# Altium PCB PCB1.PcbDoc (part 2 of 2)
Units mil, origin at the board's own origin, x right, y up, seen from the top; angles counter-clockwise.
Board outline 2180.03 x 4000.03 mil, 4 copper layers (Top Layer, GROUND, PWR, Bottom Layer), stack 23.756 mil thick; 106 components, 124 nets, 404 pads, 178 vias.
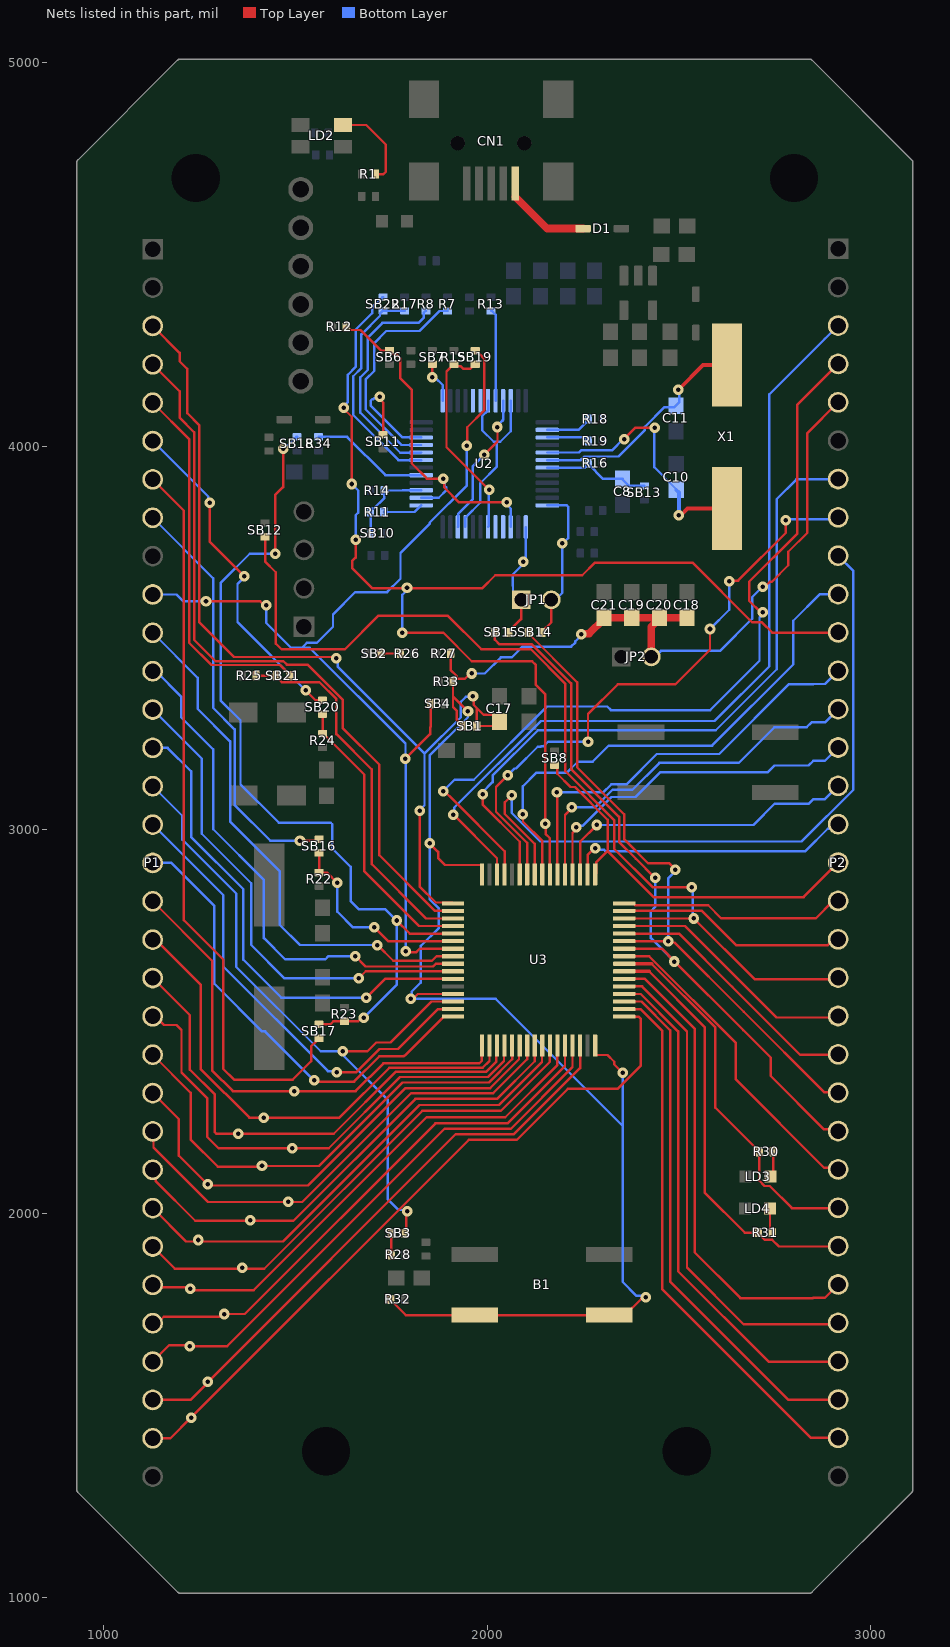
[diagram p4: the nets of this part, all layers, seen from the top]

## Via types
v1: diameter 27.56, hole 11.81, Top Layer to Bottom Layer, 166 vias
v2: diameter 11, hole 10, Top Layer to Bottom Layer, tented top, 4 vias
v3: diameter 27.56, hole 11.81, PWR to Bottom Layer, 4 vias
v4: diameter 27.56, hole 11.81, GROUND to Bottom Layer, 4 vias

## Nets (pads, with @x,y where several pads share a name; then routed paths per layer and width w, separated by ;. In a path a pad name is that pad's centre, name@x,y a point inside that pad or via, vN(x,y) a via of type N, cw(c..) or ccw(c..) an arc to the next point about the centre after c; other vN are vias at no path point) (continued)
NetLD2_4: LD2.4 R1.1 | length 232.7
  Top Layer w6.3: LD2.4@1624,4838 1684.61,4838 1735.49,4787.12 1735.49,4715.86 1729.63,4710 R1.1@1709,4710
NetLD3_1: 
NetLD4_1: LD3.1 LD4.1 R30.2 R31.2 | length 132.9
  Top Layer w6.3: LD4.1@2737.48,2013 2737.48,1957.6 2742.91,1952.17 R31.2@2742.91,1950 ; LD3.1@2739,2096 2745.43,2102.43 R30.2@2745.43,2161
NetR13_2: R13.2 U2.44 | length 240.3
  Bottom Layer w6.3: R13.2@2010,4353.17 2012.17,4353.17 2022,4343.34 U2.44@2022,4119.13
NetR18_2: R18.2 U2.2 | length 119.9
  Bottom Layer w6.3: U2.2@2157.04,4043.15 2238.4,4043.15 2264.09,4068.83 R18.2@2264.09,4071
NetR19_2: R19.2 U2.3 | length 112.1
  Bottom Layer w6.3: U2.3@2157.04,4023.46 2256.7,4023.46 2264,4016.17 R19.2@2264,4014
NetR22_1: R22.1 SB16.1 U3.6 | length 518
  Top Layer w6.3: SB16.1@1562,2940.17 R22.1@1562,2888.91 1582.09,2888.91 v1(1609,2862) ; v1(1706,2746) 1741.79,2710.21 U3.6@1910.77,2710.21
  Bottom Layer w6.3: v1(1609,2862) 1609,2787 1650,2746 v1(1706,2746)
NetR23_2: R23.2 SB17.2 SB18.2 U3.5 | length 2267.7
  Top Layer w6.3: v1(1447,3720) 1447,3873 1468,3894 v1(1468,3994) ; SB17.2@1562,2493 1590.91,2493 1599.09,2501.17 R23.2@1628,2501.17 1663.42,2501.17 1672.25,2510 v1(1678,2510) ; v1(1764,2764) 1798.1,2729.9 U3.5@1910.77,2729.9
  Bottom Layer w6.3: v1(1447,3720) 1381,3720 1305,3644 1305,3338 1357,3286 1357,3119 1457,3019 1592.31,3019 1596,3015.31 1596,2952 1644,2904 1644,2815 1666,2793 1735,2793 v1(1764,2764) 1764,2596 v1(1678,2510) ; v1@1469.76,3992.24 1502.31,4024.8 SB18.2@1504.48,4024.8
NetR24_2: R24.2 SB20.2 U3.4 | length 746.2
  Top Layer w6.3: SB20.2@1571,3302 R24.2@1571,3250.83 1573.17,3250.83 1680,3143.99 1680,2892 1822.42,2749.58 U3.4@1910.77,2749.58
NetR25_2: R25.2 SB21.2 U3.3 | length 974.3
  Top Layer w6.3: R25.2@1397.83,3402 SB21.2@1450,3402 1450,3399.83 1464.65,3385.18 1562.82,3385.18 1607,3341 1607,3249.83 1699,3157.83 1699,2911 1840.73,2769.27 U3.3@1910.77,2769.27
NetR26_1: R26.1 SB2.1 | length 51.2
  Top Layer w6.3: SB2.1@1722.91,3460 R26.1@1774.09,3460
NetR28_1: R28.1 SB3.2 | length 56
  Top Layer w6.3: R28.1@1750.09,1892 SB3.2@1750.09,1948
NetR34_1: R34.1 U2.29 | length 308.7
  Bottom Layer w6.3: R34.1@1560.48,4024.8 1634.86,4024.8 1734.62,3925.04 U2.29@1827.91,3925.04
NRST: P1.10 SB4.1 SB19.2 U3.7 | length 2733.2
  Top Layer w6.3: v1(1267,3596) 1408.25,3596 1418.25,3586 v1(1424,3586) ; v1(1787,3186) 1851.09,3250.09 1851.09,3267.17 1853.09,3269.17 SB4.1@1853.09,3329 ; v1(1788,2684) 1791,2681 1814.75,2681 1824.28,2690.53 U3.7@1910.77,2690.53 ; v1(1947,4002) 1948,4003 1948,4050 1992,4094 1992,4229.08 1971.17,4249.91 SB19.2@1969,4249.91
  Bottom Layer w6.3: P1.10@1128,3614 1190.04,3614 1208.04,3596 v1(1267,3596) ; v1(1424,3586) 1424,3540 1489,3475 1517,3475 ; v1(1788,2684) 1788,3175 1788,3185 v1(1787,3186) 1787,3225 1537,3475 1517,3475 ; v1(1947,4002) 1947,3898 1850,3801 1850,3798 1774,3722 1774,3655 1739,3620 1656,3620 1598.12,3562.12 1598.12,3529.93 1556.35,3488.16 1530.16,3488.16 1517,3475
OSC_IN: C10.2 U2.5 X1.2 | length 693.2
  Top Layer w6.3: v1(2357,4019) 2386.97,4048.97 2435.03,4048.97 v1@2436,4048
  Top Layer w10: v1(2500,3820) 2504.72,3820 2522.71,3837.99 X1.2@2625,3837.99
  Bottom Layer w6.3: U2.5@2157.04,3984.09 2239.53,3984.09 2245.1,3989.67 2325.67,3989.67 2355,4019 v1(2357,4019) ; v1@2436,4048 2436,3945.5 2493,3888.5 C10.2@2493,3886.54
  Bottom Layer w10: C10.2@2493,3886.54 2500,3879.54 v1(2500,3820)
  other v1: 2437.49,4048.97
OSC_OUT: C11.2 U2.6 X1.1 | length 588.4
  Top Layer w10: v1(2498.55,4147.65) 2562.91,4212.01 X1.1@2625,4212.01
  Bottom Layer w6.3: U2.6@2157.04,3964.41 2243.68,3964.41 2253.09,3973.81 2342.07,3973.81 2411.29,4043.03 2411.29,4051.27 2462.48,4102.46 2488,4102.46 C11.2@2492,4106.46 2500.38,4114.84 v1@2500.38,4139.62
PA0: P1.15 SB3.1 U3.14 | length 1830.2
  Top Layer w6.3: v1(1623,2423) 1688,2423 1711,2446 1748,2446 1854.73,2552.73 U3.14@1910.77,2552.73 ; SB3.1@1785.91,1948 1788.96,1951.04 1788.96,2002.96 v1(1792,2006)
  Bottom Layer w6.3: P1.15@1128,3114 1205,3037 1205,2975 1346,2834 1346,2643 1566,2423 v1(1623,2423) 1627.07,2418.93 1627.07,2409.96 1741.03,2296 1741.03,2036.97 1768.77,2009.23 1788.77,2009.23 v1(1792,2006)
PA1: P1.16 U3.15 | length 1227.7
  Top Layer w6.3: v1(1608,2368) 1658.32,2368 1719.32,2429 1768,2429 1872.05,2533.05 U3.15@1910.77,2533.05
  Bottom Layer w6.3: P1.16@1128,3014 1312,2830 1312,2644 1584.77,2371.23 1604.77,2371.23 v1(1608,2368)
PA2: P1.17 U3.16 | length 1207.9
  Top Layer w6.3: v1(1549,2347) 1552,2344 1653,2344 1719,2410 1782,2410 1784,2412 1785.98,2412 1887.35,2513.36 U3.16@1910.77,2513.36
  Bottom Layer w6.3: P1.17@1128,2914 1177,2914 1289,2802 1289,2599 1412.97,2475.03 1420.97,2475.03 v1(1549,2347)
PA3: P1.18 U3.17 | length 1303.2
  Top Layer w6.3: P1.18@1128,2814 1283,2659 1283,2373 1337,2319 v1(1497,2319) 1657,2319 1729.4,2391.4 1979.42,2391.4 1986.36,2398.34 U3.17@1986.36,2437.77
PA4: P1.21 U3.20 | length 1317.1
  Top Layer w6.3: P1.21@1128,2514 1134.7,2514 1157.1,2491.6 1189.71,2491.6 1203,2478.31 1203,2368 1269.79,2301.21 1269.79,2200.21 1300,2170 v1(1492,2170) 1587,2170 1773,2356 2002,2356 2043.89,2397.89 2043.89,2436.25 U3.20@2045.42,2437.77
PA5: P1.22 U3.21 | length 1281.2
  Top Layer w6.3: P1.22@1128,2414 1227,2315 1227,2193 1298,2122 1411,2122 v1(1413,2124) 1562,2124 1779.7,2341.7 2004.7,2341.7 2065.1,2402.1 U3.21@2065.1,2437.77
PA6: P1.23 U3.22 | length 1283.3
  Top Layer w6.3: P1.23@1128,2314 1196,2246 1196,2151 1274,2073 1533,2073 1787,2327 2008,2327 2083.08,2402.08 2083.08,2436.06 U3.22@2084.79,2437.77
  other v1: 1271,2076
PA7: P1.24 U3.23 | length 1266.5
  Top Layer w6.3: P1.24@1128,2214 1130.17,2211.83 1130.17,2171.83 1272,2030 1480,2030 v1(1481,2031) 1482,2030 1518,2030 1802,2314 2016,2314 2104.47,2402.47 U3.23@2104.47,2437.77
PA8: P2.25 U3.41 | length 843.6
  Top Layer w6.3: U3.41@2357.23,2670.84 2422.1,2670.84 2648.49,2444.45 2648.49,2349.51 2878.58,2119.42 2910.58,2119.42 P2.25@2915,2115
PA9: P2.24 SB15.1 U3.42 | length 1893.8
  Top Layer w6.3: SB15.1@2020.09,3515 2020.09,3495.91 2032,3484 2117,3484 2219,3382 2219,3159 2344,3034 2344,2968.69 2387.72,2924.97 2388.03,2924.97 v1(2438,2875) ; U3.42@2357.23,2690.53 2455.47,2690.53 2488.5,2657.5 2668,2478 2739.45,2406.55 2739.45,2358.55 2878.58,2219.42 2910.58,2219.42 P2.24@2915,2215
  Bottom Layer w6.3: v1(2438,2875) 2438,2799.12 2427,2788.12 2427,2718 v1(2488,2657)
PA10: P2.23 SB14.1 U3.43 | length 1724.7
  Top Layer w6.3: SB14.1@2107.09,3515 2107.09,3512.83 2235,3384.92 2235,3163 2357,3041 2357,2976 2420,2913 2475,2913 2490,2898 v1(2490,2896) ; U3.43@2357.23,2710.21 v1(2471.67,2710.21) 2475.23,2706.65 2488.35,2706.65 2669,2526 2878.58,2316.42 2913.58,2316.42 P2.23@2915,2315
  Bottom Layer w6.3: v1(2471.67,2710.21) 2471.67,2873.35 2490,2891.68 v1(2490,2896)
PA11: P2.22 U3.44 | length 689
  Top Layer w6.3: U3.44@2357.23,2729.9 2500.1,2729.9 2639,2591 2816,2414 2914,2414 P2.22@2915,2415
PA12: P2.21 U3.45 | length 658.3
  Top Layer w6.3: U3.45@2357.23,2749.58 2515.42,2749.58 2754,2511 2911,2511 P2.21@2915,2515
PA13: P2.20 SB12.1 U3.46 | length 2596.2
  Top Layer w6.3: SB12.1@1421,3764.09 1421,3700 1449,3672 1449,3486 1464,3471 1629,3471 1717,3559 1897,3559 1985,3471 2114,3471 2204,3381 2204,3153 2331,3026 2331,2951 2431,2851 v1(2533,2851) ; U3.46@2357.23,2769.27 v1(2538.73,2769.27) 2697,2611 2911,2611 P2.20@2915,2615
  Bottom Layer w6.3: v1(2533,2851) 2535.87,2848.13 2535.87,2772.13 v1(2538.73,2769.27)
PA14: P2.17 SB8.1 U3.49 | length 1050.4
  Top Layer w6.3: SB8.1@2176,3169.17 2176.24,3169.17 2182.73,3162.68 2182.73,3146.52 2217.25,3112 2228.83,3112 2314,3026.83 2314,2945 ; U3.49@2281.64,2884.23 2284,2886.59 2284,2915 2314,2945 ; P2.17@2915,2915 2825,2825 2434,2825 2314,2945
PA15: P2.16 U3.50 | length 742.7
  Top Layer w6.3: U3.50@2261.95,2884.23 2261.95,2934.81 2279.21,2952.07 v1(2282,2952.07)
  Bottom Layer w6.3: v1(2282,2952.07) 2285.92,2948.15 2305.23,2948.15 2308.38,2945 2830,2945 2888.05,3003.05 2890.16,3003.05 2902.11,3015 P2.16@2915,3015
PB0: P1.27 U3.26 | length 1327.8
  Top Layer w6.3: P1.27@1128,1914 1186,1856 1359,1856 v1(1362,1859) 1365,1856 1419,1856 1831,2268 2036,2268 2163.53,2395.53 U3.26@2163.53,2437.77
PB1: P1.28 U3.27 | length 1354.8
  Top Layer w6.3: P1.28@1128,1814 1133.93,1808.07 1221.93,1808.07 1230,1800 1391,1800 1842,2251 2047,2251 2183.21,2387.21 U3.27@2183.21,2437.77
  other v1: 1226,1804
PB2: P1.29 U3.28 | length 1405.7
  Top Layer w6.3: P1.29@1128,1714 1139.64,1714 1156.64,1731 1301.25,1731 1308.25,1738 1368,1738 1865,2235 2053,2235 2202.9,2384.9 U3.28@2202.9,2437.77
  other v1: 1314,1738
PB3: P2.11 SB22.2 U3.55 | length 3231.3
  Top Layer w6.3: v1(1625.78,4101.22) 1625.78,4098.37 1647,4077.15 v1(1647,3902) ; v1(1657,3757) 1657,3710.12 1648,3701.12 1648,3683 1701,3630 1791,3630 1987,3630 2021,3664 2248,3664 2281,3697 2535.14,3697 2691.07,3541.07 2716.67,3541.07 2743.74,3514 2914,3514 P2.11@2915,3515 ; v1(1779,3514) 1886,3514 1960,3440 2117.35,3440 2127,3430.35 2127,3378.21 2151,3354.21 v1(2151,3016) 2152.38,3014.62 2152.38,2989.62 2163.53,2978.47 U3.55@2163.53,2884.23
  Bottom Layer w6.3: v1(1625.78,4101.22) 1625.78,4104.32 1637,4115.54 1637,4187 1657,4207 1657,4304 1700,4347 1700,4362.17 1726.83,4389 SB22.2@1729,4389 ; v1(1647,3902) 1664,3885 1664,3827.38 1657,3820.38 v1(1657,3757) ; v1(1779,3514) 1779,3613.25 1791,3625.25 v1(1791,3631)
PB4: P2.10 U3.56 | length 1347.1
  Top Layer w6.3: v1(2093,3041) 2093.54,3040.46 2093.54,3021.46 2143.84,2971.16 U3.56@2143.84,2884.23
  Bottom Layer w6.3: v1(2093,3041) 2093,3114 2127.68,3148.68 2206.68,3148.68 2236,3178 2275,3178 2317,3220 2586.32,3220 2798,3431.68 2798,3545.62 2867.38,3615 P2.10@2915,3615
PB5: P2.9 U3.57 | length 1895.4
  Top Layer w6.3: v1(2064,3090) 2046,3072 2046,3042 2124.16,2963.84 U3.57@2124.16,2884.23
  Bottom Layer w6.3: v1(2064,3090) 2064,3044.64 2138.64,2970 2820,2970 2955,3105 2955,3675 P2.9@2915,3715
PB6: P2.8 U3.58 | length 1584.4
  Top Layer w6.3: v1(2054,3143) 2023,3112 2023,3047.65 2104.47,2966.17 U3.58@2104.47,2884.23 ; v1(2263,3230) 2263,3302 2341,3380 2491,3380 2581,3470 v1(2581,3524) ; v1(2631,3649) 2632.23,3650.23 2654.23,3650.23 2779,3775 v1(2779,3807)
  Bottom Layer w6.3: v1(2054,3143) 2071.29,3160.29 2075.29,3160.29 2132,3217 2140,3217 2141,3218 2147,3218 2159,3230 v1(2263,3230) ; v1(2581,3524) 2631,3574 v1(2631,3649) ; v1@2775.82,3807 2779.32,3810.5 2910.5,3810.5 P2.8@2915,3815
PB7: P2.7 U3.59 | length 1789.6
  Top Layer w6.3: v1(1988,3093) 1988,3066 2084.79,2969.21 U3.59@2084.79,2884.23
  Bottom Layer w6.3: v1(1988,3093) 1988,3098.36 2014.28,3124.64 2014.28,3142.04 2132.24,3260 2596,3260 2755,3419 2755,3862.66 2806.34,3914 2914,3914 P2.7@2915,3915
PB8: P2.4 U3.61 | length 2150.4
  Top Layer w6.3: v1(1885,3101) 1889,3101 1911,3079 2045.42,2944.58 U3.61@2045.42,2884.23 ; v1(2718.07,3568) 2712.6,3568 2683,3597.6 2683,3647 2808,3772 2808,4108 P2.4@2915,4215
  Bottom Layer w6.3: v1(1885,3101) 1915,3131 1965,3131 2156,3322 2313.09,3322 2322.52,3312.57 2581.57,3312.57 2710,3441 2710,3554.18 2718.07,3562.25 v1(2718.07,3568)
PB9: P2.3 U3.62 | length 2158.7
  Top Layer w6.3: v1(1912,3040) 2025.73,2926.27 U3.62@2025.73,2884.23
  Bottom Layer w6.3: v1(1912,3040) 1914.13,3042.13 1914.13,3058.13 2140,3284 2593,3284 2736,3427 2736,4136 2880.25,4280.25 P2.3@2915,4315
PB10: P1.30 U3.29 | length 1471.2
  Top Layer w6.3: P1.30@1128,1614 1171,1657 1222,1657 v1(1225,1654) 1322,1654 1889,2221 2062,2221 2222.58,2381.58 U3.29@2222.58,2437.77
PB11: P1.31 U3.30 | length 1532.3
  Top Layer w6.3: P1.31@1128,1514 1227,1514 1272,1559 v1(1272,1561) 1918,2207 2070,2207 2242.27,2379.27 U3.30@2242.27,2437.77
PB12: P1.32 U3.33 | length 1842.4
  Top Layer w6.3: P1.32@1128,1414 1174,1414 v1(1228,1468) 1952,2192 2077,2192 2210,2325 2340,2325 2400,2385 2400,2508.31 2395.61,2512.7 2357.89,2512.7 U3.33@2357.23,2513.36
PB13: P2.32 U3.34 | length 1415.7
  Top Layer w6.3: U3.34@2357.23,2533.05 2399.95,2533.05 2457,2476 2457,1802 2844,1415 P2.32@2915,1415
PB14: P2.31 U3.35 | length 1372.1
  Top Layer w6.3: U3.35@2357.23,2552.73 2402.27,2552.73 2477,2478 2477,1823 2786,1514 2914,1514 P2.31@2915,1515
PB15: P2.30 U3.36 | length 1321.5
  Top Layer w6.3: U3.36@2357.23,2572.42 2400.58,2572.42 2498,2475 2498,1849.69 2733.69,1614 2914,1614 P2.30@2915,1615
PC0: P1.11 U3.8 | length 1393.7
  Top Layer w6.3: v1(1714,2700) 1755,2659 1856,2659 1867.84,2670.84 U3.8@1910.77,2670.84
  Bottom Layer w6.3: P1.11@1128,3514 1245,3397 1245,3316 1330,3231 1330,3022 1459,2893 1459,2753 1512,2700 v1(1714,2700)
PC1: P1.12 U3.9 | length 1353.8
  Top Layer w6.3: v1(1656,2671) 1683,2644 1859,2644 1866.16,2651.16 U3.9@1910.77,2651.16
  Bottom Layer w6.3: P1.12@1128,3414 1136,3414 1202,3348 1202,3294 1286,3210 1286,3002 1418,2870 1418,2718.04 1473.04,2663 1578.36,2663 1586.36,2671 v1(1656,2671)
PC2: P1.13 U3.10 | length 1289.9
  Top Layer w6.3: v1(1665,2613) 1683.47,2631.47 U3.10@1910.77,2631.47
  Bottom Layer w6.3: P1.13@1128,3314 1256,3186 1256,2990 1385,2861 1385,2700 1472,2613 v1(1665,2613)
PC3: P1.14 U3.11 | length 1280.6
  Top Layer w6.3: v1(1685,2563) 1733.79,2611.79 U3.11@1910.77,2611.79
  Bottom Layer w6.3: P1.14@1128,3214 1167,3214 1228,3153 1228,2981.68 1364,2845.68 1364,2662 1463,2563 v1(1685,2563)
PC4: P1.25 U3.24 | length 1278
  Top Layer w6.3: P1.25@1128,2114 1136.45,2105.55 1136.45,2083.55 1239,1981 1381,1981 v1(1382,1982) 1383,1981 1495,1981 1813,2299 2026,2299 2124.16,2397.16 U3.24@2124.16,2437.77
PC5: P1.26 U3.25 | length 1291.3
  Top Layer w6.3: P1.26@1128,2014 1215,1927 1243,1927 v1(1247,1931) 1251,1927 1468,1927 1824,2283 2031,2283 2143,2395 2143,2436.93 U3.25@2143.84,2437.77
PC6: P2.29 U3.37 | length 1285.2
  Top Layer w6.3: U3.37@2357.23,2592.1 2403.9,2592.1 2521,2475 2521,1859 2669,1711 2911,1711 P2.29@2915,1715
PC7: P2.28 U3.38 | length 1258.6
  Top Layer w6.3: U3.38@2357.23,2611.79 2411.21,2611.79 2541,2482 2541,1899 2660.38,1779.62 2849.62,1779.62 2850.4,1780.4 2880.4,1780.4 P2.28@2915,1815
PC8: P2.27 R31.1 U3.39 | length 1109.1
  Top Layer w6.3: 2421.53,2631.47 2567,2486 2567,2055.03 2672.03,1950 R31.1@2707.09,1950 2707.09,1947.83 2723.15,1931.77 2743.08,1931.77 2760.84,1914 2914,1914 P2.27@2915,1915
  Top Layer w10: U3.39@2357.23,2631.47 2421.53,2631.47
PC9: P2.26 R30.1 U3.40 | length 989
  Top Layer w6.3: 2428.84,2651.16 2595,2485 2595,2275.61 R30.1@2709.61,2161 2709.61,2085.41 2723.32,2071.7 2736.85,2071.7 2794.55,2014 2914,2014 P2.26@2915,2015
  Top Layer w10: U3.40@2357.23,2651.16 2428.84,2651.16
PC10: P2.15 U3.51 | length 818.1
  Top Layer w6.3: U3.51@2242.27,2884.23 2242.27,2969.27 v1(2286,3013)
  Bottom Layer w6.3: v1(2286,3013) 2694,3013 2749.66,3068.66 2838.66,3068.66 2850.62,3080.62 2880.62,3080.62 P2.15@2915,3115
PC11: P2.14 U3.52 | length 895.8
  Top Layer w6.3: U3.52@2222.58,2884.23 2222.58,2991.83 2232,3001.25 v1(2232,3007)
  Bottom Layer w6.3: v1(2232,3007) 2235.63,3010.63 2248.63,3010.63 2324,3086 2387,3086 2451,3150 2731,3150 2749.04,3168.04 2838.04,3168.04 2850.55,3180.55 2880.55,3180.55 P2.14@2915,3215
PC12: P2.13 U3.53 | length 982.9
  Top Layer w6.3: U3.53@2202.9,2884.23 2202.9,3038.8 2220,3055.9 v1(2220,3059)
  Bottom Layer w6.3: v1(2220,3059) 2281,3059 2327,3105 2379,3105 2449,3175 2656,3175 2748.87,3267.87 2832.87,3267.87 2845.53,3280.53 2880.53,3280.53 P2.13@2915,3315
PC13: P1.4 U3.2 | length 1912
  Top Layer w6.3: P1.4@1128,4214 1198,4144 1198,4075 1236,4037 1236,3496 1292,3440 1469,3440 1478,3431 1532,3431 1623,3340 1623,3266 1719,3170 1719,2934 1864.05,2788.95 U3.2@1910.77,2788.95
PC14: P1.5 SB21.1 | length 965.1
  Top Layer w6.3: P1.5@1128,4114 1223,4019 1223,3488 1281,3430 1459.99,3430 1485.83,3404.17 SB21.1@1485.83,3402
PC15: P1.6 SB20.1 | length 885
  Top Layer w6.3: v1(1277,3853) 1277,3751 v1(1367,3661) ; v1(1527,3364) 1553.17,3337.83 SB20.1@1571,3337.83
  Bottom Layer w6.3: P1.6@1128,4014 1272.93,3869.07 1272.93,3857.07 v1(1277,3853) ; v1(1367,3661) 1367,3659.7 1349,3641.7 1349,3542 v1(1527,3364)
PD2: P2.12 U3.54 | length 1078.5
  Top Layer w6.3: v1@2181.94,3097.94 2183.15,3096.72 U3.54@2183.15,2884.29
  Bottom Layer w6.3: v1(2182,3098) 2302.35,3098 2323.35,3119 2363,3119 2442,3198 2605,3198 2787.4,3380.4 2850.4,3380.4 2850.49,3380.49 2880.49,3380.49 P2.12@2915,3415
PF0: P1.7 SB17.1 | length 1943.8
  Top Layer w6.3: P1.7@1128,3914 1209,3833 1209,2765 1312,2662 1312,2377 1340,2349 1493,2349 1541,2397 1541,2436.17 1553.34,2448.51 1553.34,2450.68 1559.83,2457.17 SB17.1@1562,2457.17
PF1: P1.8 SB16.2 | length 1097.8
  Top Layer w6.3: v1(1512,2972) 1558,2972 SB16.2@1562,2976
  Bottom Layer w6.3: P1.8@1128,3814 1286,3656 1286,3318 1341.7,3262.3 1341.7,3065.3 1435,2972 v1(1512,2972)
PF4: P1.19 U3.18 | length 1300
  Top Layer w6.3: P1.19@1128,2714 1135.7,2714 1253,2596.7 1253,2377 1380,2250 v1(1417,2250) 1615,2250 1745,2380 1988,2380 2006.05,2398.05 U3.18@2006.05,2437.77
PF5: P1.20 U3.19 | length 1325.3
  Top Layer w6.3: P1.20@1128,2614 1225,2517 1225,2375 1290,2310 1290,2211.69 1293.69,2208 v1(1351,2208) 1600,2208 1762,2370 1998,2370 2024.05,2396.05 2024.05,2436.09 U3.19@2025.73,2437.77
PF6: P2.19 U3.47 | length 601.7
  Top Layer w6.3: U3.47@2357.23,2788.95 2560.05,2788.95 2650,2699 2887.49,2699 2903.49,2715 P2.19@2915,2715
PF7: P2.18 U3.48 | length 592.4
  Top Layer w6.3: U3.48@2357.23,2808.64 2380.65,2808.64 2385.6,2803.69 2576.31,2803.69 2610,2770 2857.11,2770 2902.11,2815 P2.18@2915,2815
STLINK_RX: JP1.1 SB15.2 U2.13 | length 311.8
  Top Layer w6.3: SB15.2@2055.91,3515 2055.91,3517.17 2088.63,3549.88 JP1.1@2088.63,3600
  Bottom Layer w6.3: JP1.1@2088.63,3600 2067.37,3621.26 2067.37,3636.27 2066.63,3637.01 2066.63,3665.88 2094,3693.25 v1(2094,3699) 2094,3704.75 2100.74,3711.49 U2.13@2100.74,3790
STLINK_TX: JP1.2 SB14.2 U2.12 | length 418.9
  Top Layer w6.3: SB14.2@2142.91,3515 2142.91,3517.17 2167.37,3541.62 JP1.2@2167.37,3600
  Bottom Layer w6.3: U2.12@2157.04,3846.3 2207.45,3846.3 2211.14,3842.61 2211.14,3760.49 2198.65,3748 v1(2196,3748) 2196,3618.63 2177.37,3600 JP1.2@2167.37,3600
STM_JTCK: SB7.2 U2.37 | length 110.1
  Top Layer w6.3: v1@1857,4180 SB7.2@1857,4214.17
  Bottom Layer w6.3: v1(1857.19,4179.81) 1864.19,4179.81 1884.2,4159.8 U2.37@1884.2,4119.13
STM_JTMS: SB11.2 U2.34 | length 309.7
  Top Layer w6.3: v1(1719.68,4129.32) 1719.68,4123.57 1729,4114.25 SB11.2@1729,4029.91
  Bottom Layer w6.3: v1(1719.68,4129.32) 1715.61,4125.25 1705.1,4125.25 1702.54,4122.69 1699.69,4122.69 1696,4119 1696,4107 1779.46,4023.54 1827.83,4023.54 U2.34@1827.91,4023.46
STM_RST: C8.2 R16.1 SB13.2 U2.7 | length 283.6
  Bottom Layer w6.3: U2.7@2157.04,3944.72 2254.98,3944.72 R16.1@2264.09,3953.83 ; R16.1@2264.09,3956 R16.1@2264.09,3953.83 ; SB13.2@2410,3896.91 2369.58,3896.91 2353,3913.5 C8.2@2353,3915.46 2302.46,3915.46 R16.1@2264.09,3953.83
SWIM: U2.22 U2.45 | length 377.8
  Top Layer w6.3: v1(1992,3978) 2026.85,4012.85 2026.85,4050.77 v1@2026.81,4050.81
  Bottom Layer w6.3: U2.22@1923.57,3790 1924.09,3790.51 1924.09,3824.09 1962,3862 1962,3948 v1(1992,3978) ; v1@2027,4051 2027,4054 2040.21,4067.21 2040.21,4068.42 2041.68,4069.9 U2.45@2041.68,4119.13
  other v1: 2026.85,4050.55
SWIM_IN: U2.21 U2.43 U2.46 | length 518
  Bottom Layer w6.3: U2.21@1943.26,3790 1943.26,3815.2 1943.77,3815.71 1944.71,3815.71 1982,3853 1982,3904 2025.5,3947.5 2025.5,4012 ; U2.43@2002.31,4119.13 2002.31,4093.94 1987,4078.62 1987,4042 2017,4012 2025.5,4012 ; U2.46@2061.37,4119.13 2061.37,4039.37 2034,4012 2025.5,4012
SWIM_RST: U2.42
SWIM_RST_IN: U2.41
T_JTCK: R12.2 SB6.1 U2.15 U2.26 | length 936.5
  Top Layer w6.3: R12.2@1632.91,4311.36 1634.28,4310 1637,4310 1643.42,4303.58 1669.42,4303.58 1723,4250 SB6.1@1745,4250 ; SB6.1@1747.17,4250 1756.35,4240.82 1762.72,4240.82 1773,4230.54 1773,4178 1803,4148 1803,3956 1842.9,3916.1 1884.9,3916.1 1888.23,3912.77 1888.23,3892.77 1927,3854 v1(2051,3854)
  Bottom Layer w6.3: U2.26@1827.91,3865.98 1873.61,3865.98 1894,3886.37 1894,3892.67 1889.07,3897.6 1889.07,3911.93 v1(1885,3916) ; v1(2051,3854) 2051,3848.25 2061.37,3837.88 U2.15@2061.37,3790
T_JTDI: U2.17
T_JTDO: U2.16
T_JTMS: R11.2 R14.2 SB10.1 U2.27 | length 225.6
  Bottom Layer w6.3: SB10.1@1697.09,3773 1696.09,3774 1696.09,3828 R11.2@1695.09,3829 1695.09,3831.17 1701.58,3837.66 1703.75,3837.66 1731.91,3865.83 R14.2@1731.91,3885 1779.11,3885 1779.78,3885.67 U2.27@1827.91,3885.67
T_NRST: R15.2 SB19.1 U2.18 | length 545
  Top Layer w6.3: SB19.1@1969,4214.09 1966.83,4214.09 1954.83,4202.09 1937.95,4202.09 1930.6,4209.44 1917.65,4209.44 R15.2@1913,4214.09 1894,4195.09 1894,3998 v1(2005,3887)
  Bottom Layer w6.3: U2.18@2002.31,3790 2003.66,3791.34 2003.66,3885.66 v1(2005,3887)
T_SWDIO_IN: R11.1 U2.25 | length 104.2
  Bottom Layer w6.3: R11.1@1730.91,3829 1810.61,3829 U2.25@1827.91,3846.3
T_SWO: R17.2 SB22.1 U2.31 | length 586.2
  Bottom Layer w6.3: R17.2@1785,4353.17 1727.04,4353.17 1720.54,4346.68 1720.54,4340.54 1672,4292 1672,4204 1651,4183 1651,4082 1768.59,3964.41 U2.31@1827.91,3964.41
U5V: CN1.1 D1.1 | length 245.7
  Top Layer w6.3: CN1.1@2073.19,4651.06 CN1.1@2073.19,4685.51
  Top Layer w20: CN1.1@2073.19,4651.06 2156.25,4568 D1.1@2250,4568
USB_DM: R8.2 U2.32 | length 595
  Bottom Layer w6.3: U2.32@1827.91,3984.09 1827.39,3983.58 1773.42,3983.58 1669,4088 1669,4180 1689,4200 1689,4284 1727,4322 1821,4322 1834.19,4335.19 1834.19,4348.44 1838.83,4353.09 R8.2@1841,4353.09
USB_DP: R7.2 U2.33 | length 591.4
  Bottom Layer w6.3: U2.33@1827.91,4003.78 1776.22,4003.78 1683,4097 1683,4174.36 1706,4197.36 1706,4270 1737,4301 1824,4301 1876,4353 R7.2@1897,4353
VDD: B1.1 B1.2 C18.2 C19.1 C20.1 C21.1 JP2.2 P2.5 R27.1 R32.2 R33.2 SB1.2 U3.13 U3.32 U3.64 | length 5284.2
  Top Layer w1: R33.2@1910.91,3387 1913.36,3389.45 R33.2@1913.36,3390.91
  Top Layer w6.3: R32.2@1749.09,1776 1749.09,1773.83 1787.66,1735.26 B1.1@1967.8,1735.26 B1.2@2318.2,1735.26 2359.54,1735.26 2402.21,1777.93 2408.93,1777.93 v1(2413,1782) ; v1(1801,2560) 1806.75,2560 1819.17,2572.42 U3.13@1910.77,2572.42 ; v1(1850,2965) 1872.22,2942.78 1872.22,2926.78 1890.36,2908.64 1984,2908.64 1986.36,2906.28 U3.64@1986.36,2884.23 ; R27.1@1904.91,3460 1904.7,3459.79 1904.7,3417.11 1920.91,3400.89 1920.91,3393.73 ; R33.2@1910.91,3387 1910.91,3348.09 ; R33.2@1914.66,3392.91 1915.48,3393.73 1920.91,3393.73 ; SB1.2@1937.09,3271 1937.09,3273.17 1930.59,3279.66 1928.43,3279.66 1920.91,3287.17 1920.91,3310.21 1910.91,3320.21 1910.91,3348.09 ; v1(1950,3309) 1910.91,3348.09 ; v1(1960,3408) 1955.69,3408 1941.42,3393.73 1920.91,3393.73 ; U3.32@2281.64,2437.77 2281.64,2415.72 2284,2413.36 2313.64,2413.36 2331.28,2395.72 2331.28,2388.72 v1(2353,2367) ; v1(2718.07,3634) 2723.82,3634 2737.01,3647.19 2742.19,3647.19 2785.18,3690.18 2785.18,3725.18 2835,3775 2835,4035 P2.5@2915,4115
  Top Layer w20: v1(2245,3510) 2246.45,3511.45 2265.34,3511.45 2305,3551.1 C21.1@2305,3553.07 C19.1@2377,3553.07 C20.1@2449,3553.07 ; JP2.2@2428,3451.25 2428,3530.1 2449,3551.1 C20.1@2449,3553.07 ; C18.2@2521,3553 C18.2@2521,3553 2449.04,3553.04 C20.1@2449,3553.07
  Bottom Layer w6.3: v1(1950,3309) 1950,3294 1850,3194 v1(1850,2965) 1850,2819.45 1874,2795.45 1874,2744.64 1827,2697.64 1827,2602 1803.13,2578.13 1803.13,2562.13 v1(1801,2560) 2022,2560 2353,2229 ; v1(1960,3408) 1993.88,3408 2035.88,3450 2064,3450 2092,3478 2219,3478 2229.97,3488.97 2229.97,3492.18 2245,3507.22 v1(2245,3510) ; v1(2353,2367) 2353,2229 ; v1(2413,1782) 2409.77,1785.23 2389.77,1785.23 2353,1822 2353,2229 ; JP2.2@2428,3451.25 2437.2,3451.25 2452.95,3467 2607,3467 2690.67,3550.67 2690.67,3606.6 v1(2718.07,3634)
VDD_3: C17.1 P1.3 SB1.1 U3.1 | length 2452
  Top Layer w6.3: P1.3@1128,4314 1198,4244 1198,4222 1218,4202 1218,4087 1249.07,4055.93 1249.07,3541.93 1340,3451 1603.07,3451 v1(1606,3448.07) ; v1(1824,3050) 1824,2853 1866,2811 1908.41,2811 U3.1@1910.77,2808.64 ; v1(1963,3349) 1965.23,3346.77 1965.23,3325.77 1972.96,3318.04 ; 1972.96,3318.04 1990.43,3300.57 2015.46,3300.57 2032,3284.04 C17.1@2032,3282.07 2020.93,3271 SB1.1@1972.91,3271 1972.96,3271.04 1972.96,3318.04
  Bottom Layer w6.3: v1(1606,3448.07) 1610.07,3444 1610.07,3425.93 1836.71,3199.29 ; v1(1824,3050) 1824,3051.61 1836.71,3064.32 1836.71,3199.29 ; v1(1963,3349) 1961.37,3347.37 1944.37,3347.37 1931,3334 1931,3293.59 1836.71,3199.29
pads on no net: CN1. CN1.SH1 CN1.SH2 CN1.SH3 CN1.SH4 mth1. mth2. mth3. mth. U2.4 U2.11 U2.14 U2.19 U2.28 U2.38 U2.39 U2.40
copper on no net: | length 23341.6
  Top Layer w20: 940,1280 1200,1020 2840,1020 3100,1280 3100,4740 2840,5000 1520,5000 1200,5000 940,4740 940,1280
  Bottom Layer w20: 940,1280 1200,1020 2840,1020 3080,1260 3100,1280 3100,4740 2840,5000 1520,5000 1200,5000 940,4740 940,1280

## Polygon pours and split planes (outlines as drawn)
GND on Bottom Layer "GND_L04_P002" (solid, pour order 2): 2324,3946 2324,3942 2339,3942 2343,3946 2347,3942 2360,3942 2360,3946
3V on PWR (split plane): 3089.92,4735.82 3089.92,1284.18 2835.82,1030.08 1204.18,1030.08 950.08,1284.18 950.08,4735.82 1204.18,4989.92 2835.82,4989.92
GND on GROUND (split plane): 3089.92,4735.82 3089.92,1284.18 2835.82,1030.08 1204.18,1030.08 950.08,1284.18 950.08,4735.82 1204.18,4989.92 2835.82,4989.92

## Silkscreen, mask and mechanical layers (free items; w line width, h text height)
Top Overlay:
  text "STM" at 1804.83,1235 h27.56
Bottom Overlay:
  text "STM" at 2275.17,1235 h27.56

## Text inside footprints (layer, text, board x,y; h text height)
CN1: Mechanical 13 "PCB EDGE" at 1842.7,5040.69 h31.52 r180